# Altium PCB FEM.PcbDoc (part 2 of 2)
Units mil, origin at the board's own origin, x right, y up, seen from the top; angles counter-clockwise.
Board outline 1528 x 1869 mil, 4 copper layers (Top Layer, Internal Plane 1, Signal Layer 1, Bottom Layer), stack 60.752 mil thick; 238 components, 134 nets, 657 pads, 326 vias.
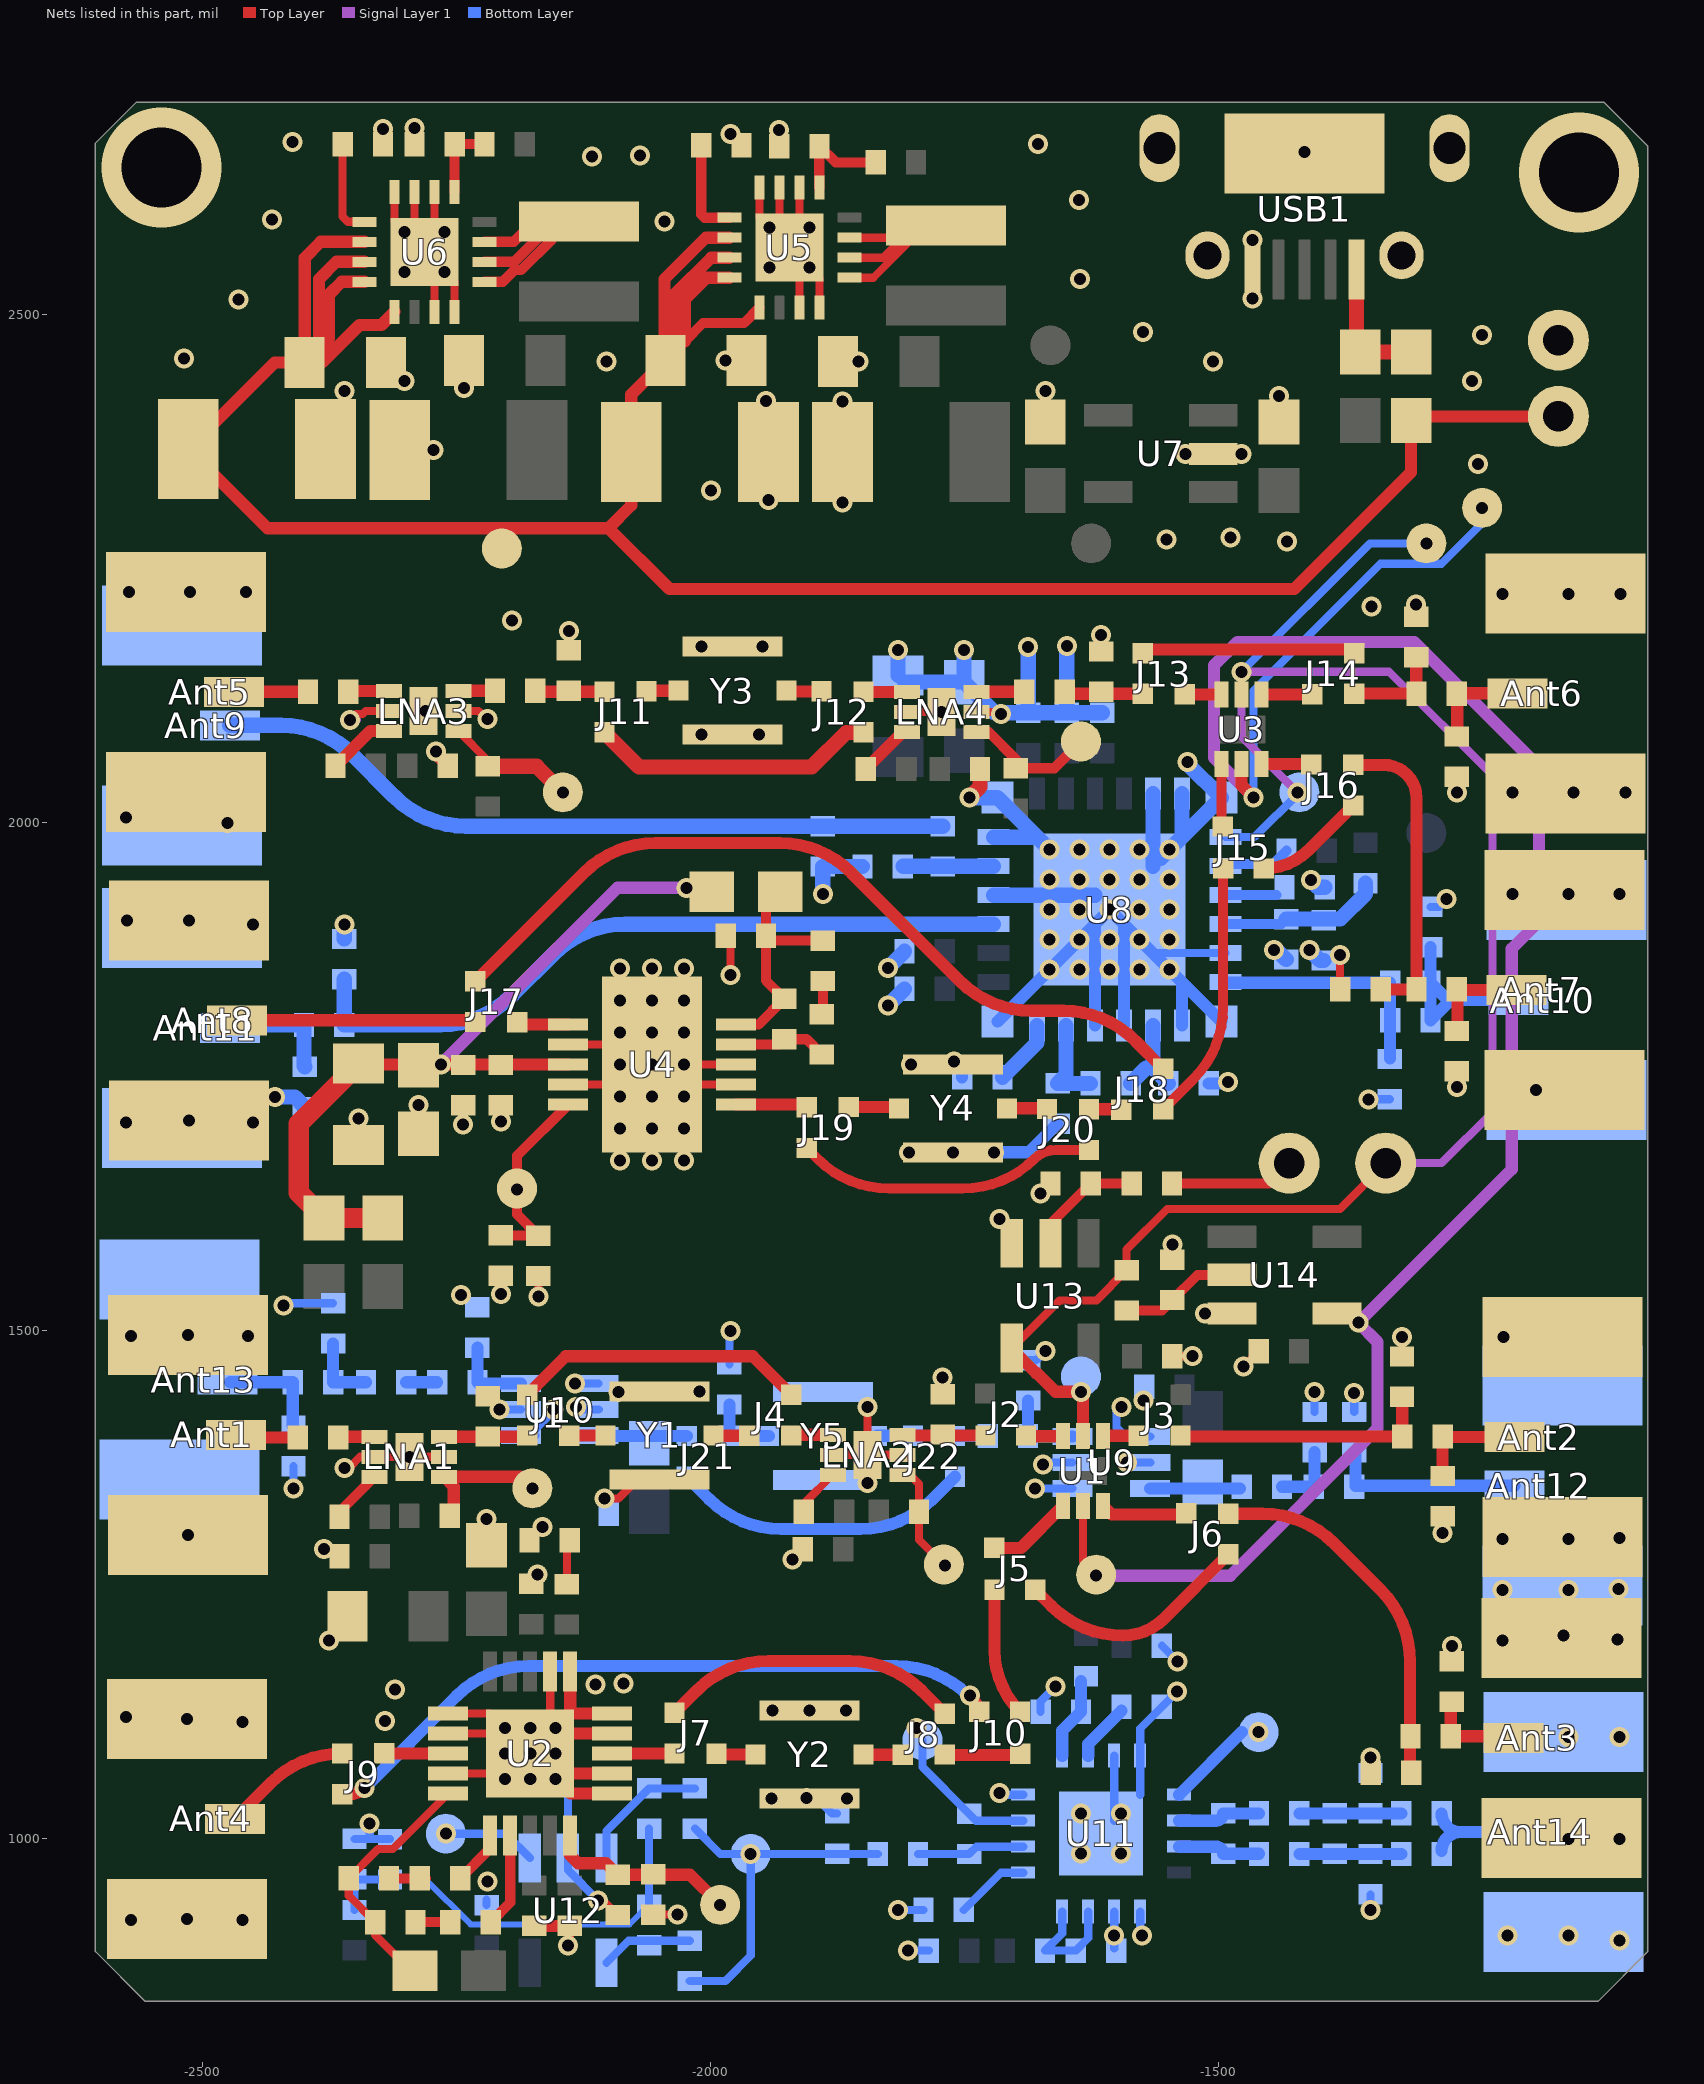
[diagram p4: the nets of this part, all layers, seen from the top]

## Via types
v1: diameter 19.68, hole 11.81, Top Layer to Bottom Layer, 315 vias
v2: diameter 20/20/20 (per signal layer), hole 12, Top Layer to Bottom Layer, 9 vias
v3: diameter 118.11, hole 78.74, Top Layer to Bottom Layer, 2 vias

## Nets (pads, with @x,y where several pads share a name; then routed paths per layer and width w, separated by ;. In a path a pad name is that pad's centre, name@x,y a point inside that pad or via, vN(x,y) a via of type N, cw(c..) or ccw(c..) an arc to the next point about the centre after c; other vN are vias at no path point) (continued)
GND: Ant1.GND Ant2.GND Ant3.GND Ant4.GND Ant5.GND Ant6.GND Ant7.GND Ant8.GND Ant9.GND Ant10.GND Ant11.GND Ant12.GND Ant13.GND Ant14.GND C1.1 C3.1 C4.1 C5.1 C6.1 C7.1 C8.1 C9.1 C11.1 C12.2 C13.2 C14.2 C15.1 C17.1 C19.1 C21.1 C22.1 C23.1 C24.1 C25.1 C26.1 C27.1 C28.1 C30.2 C31.2 C32.2 C33.2 C34.2 C35.2 C36.2 C37.1 C38.1 C39.2 C40.2 C41.1 C42.1 C43.2 C44.2 C45.1 C46.1 C47.1 C48.1 C49.2 C50.1 C51.1 C52.1 C53.1 C55.1 C56.1 C57.1 C59.1 C60.1 C61.1 C63.1 C64.1 C65.1 C66.1 C68.1 C69.1 C70.1 C71.1 C72.1 C73.1 C74.1 C75.1 C76.1 C82.1 C84.2 C85.2 C86.1 C87.1 C88.2 C89.1 C90.2 C91.2 C92.2 C93.2 LNA1.0 LNA1.2 LNA1.5 LNA2.0 LNA2.2 LNA2.5 LNA3.0 LNA3.2 LNA3.5 LNA4.0 LNA4.2 LNA4.5 R3.1 R4.1 R14.1 R17.2 R18.2 R21.2 R22.2 R23.2 R26.2 R27.2 R29.1 R37.1 T15.1 U2.0 U2.1 U2.2 U2.4 U2.11 U2.12 U2.14 U2.15 U2.16 U2.17 U4.0 U4.2 U4.4 U4.7 U4.8 U5.0 U5.6 U5.7 U5.8 U5.15 U5.16 U6.0 U6.6 U6.7 U6.8 U6.15 U6.16 U7.2 U8.0 U8.1 U8.6 U8.8 U8.9 U8.11 U8.12 U8.15 U8.19 U8.21 U8.22 U8.27 U8.28 U9.1 U9.2 U9.4 U9.5 U10.1 U10.2 U10.4 U10.5 U11.0 U11.1 U11.2 U11.8 U11.11 U11.12 U12.2 U13.3 U14.3 USB1.5 Y1.1 Y1.3 Y2.1 Y2.3 Y3.1 Y3.3 Y4.1 Y4.3 Y5.1 Y5.3 | length 6832
  Top Layer w8: v1(-2575,2005) -2549.85,2030.15 Ant5.GND@-2516,2030.15 -2505.15,2030.15 v1(-2475,2000) ; v1(-2574,1904) v1(-2513,1904) -2454,1904 v1(-2450,1900) ; v1(-2572,2227) Ant5.GND@-2516,2227 v1(-2512,2227) v1(-2457,2227) ; C39.2@-2378.48,2368 -2360,2386.48 v1(-2360,2425) ; v1(-2375,1195) -2357,1213 C11.1@-2357,1219 ; v1(-2360,1365) -2355.39,1365 -2344.39,1376 LNA1.5@-2330.25,1376 v1(-2296,1376) LNA1.2@-2261.75,1376 ; v1(-2354.42,2101.16) -2348.57,2107 -2341.86,2107 -2338.86,2110 LNA3.5@-2316.25,2110 ; C30.2@-2346,1683 v1(-2346,1709) ; C44.2@-2322,2668 v1(-2322,2683) ; C40.2@-2319,2453 v1(-2301,2435) ; U6.0@-2310.53,2591.53 U6.8@-2310.53,2621.06 ; C42.1@-2305.52,2367 v1(-2272,2367) ; R18.2@-2291,2668 v1(-2291,2684) ; U6.0@-2290.84,2571.84 U6.7@-2290.84,2621.06 ; C31.2@-2287,1694 v1(-2287,1722) ; LNA3.0@-2282,2110 v1(-2280,2110) ; U6.15@-2271.16,2502.94 U6.0@-2271.16,2552.16 ; U6.0@-2271.16,2571.84 U6.6@-2271.16,2621.06 ; v1(-2270,2070) -2275,2070 -2261,2056 C21.1@-2258.32,2056 ; U2.4@-2257.71,1064.32 U2.0@-2196.68,1064.32 ; U2.2@-2257.71,1103.68 U2.0@-2196.68,1103.68 ; U2.1@-2257.71,1123.37 U2.0@-2216.37,1123.37 ; U6.16@-2251.47,2502.94 U6.0@-2251.47,2532.47 ; LNA3.2@-2247.75,2110 -2227.83,2110 -2219.98,2102.16 v1(-2219.11,2102.16) ; v1(-2243,1703) C32.2@-2243,1722 ; v1(-2242,2428) C41.1@-2242,2455 ; C12.2@-2220,1289 v1(-2220,1315) ; v1(-2206,1536) R14.1@-2206,1554.32 ; v1(-2206,1706) C33.2@-2206,1722 ; R3.1@-2177.68,1294 v1(-2165,1306.68) ; C13.2@-2176,1251 -2165,1262 -2168,1262 v1(-2170,1260) ; v1(-2169,1534) C34.2@-2169,1554 ; U2.0@-2157.32,1103.68 U2.17@-2157.32,1164.71 ; v1(-2140,895) -2138,897 C15.1@-2138,914.32 ; U4.4@-2139.68,1742.32 U4.0@-2076.68,1742.32 ; U4.2@-2139.68,1781.68 U4.0@-2076.68,1781.68 ; C19.1@-2139,2169.69 v1(-2139,2189) ; v1(-2110.16,939.44) -2110.16,939.84 -2110,940 -2106,940 C14.2@-2091,925 ; v1(-2104,1335) -2090,1335 Y1.3@-2071.31,1353.69 ; v1(-2090,1440) -2089.69,1440.31 Y1.1@-2050,1440.31 v1(-2010.31,1440.31) ; v1(-2057,1762) v1(-2025.5,1762) U4.8@-1974.32,1762 ; R4.1@-2056,925.32 -2032.37,925.32 v1(-2032.16,925.53) ; U4.0@-2037.32,1742.32 U4.7@-1974.32,1742.32 ; v1(-2008.31,2086.69) Y3.3@-1978,2086.69 v1(-1951.69,2086.69) ; v1(-2008.31,2173.31) Y3.1@-1978,2173.31 v1(-1948.31,2173.31) ; v1(-1985,2455) C36.2@-1964,2455 ; C28.1@-1984.68,1889 -1980,1884.31 v1(-1980,1850) ; v1(-1980,2678) C43.2@-1969,2667 ; U5.0@-1951.53,2595.53 U5.8@-1951.53,2625.06 ; v1(-1945,2415) -1945,2367.52 C35.2@-1942.48,2365 v1(-1942.48,2317.52) ; v1(-1939.69,1039.69) Y2.1@-1902,1039.69 v1(-1865.31,1039.69) ; v1(-1938.69,1126.31) v1(-1902,1126.31) v1(-1866.31,1126.31) ; R17.2@-1932,2666 v1(-1932,2682) ; U5.0@-1931.84,2575.84 U5.7@-1931.84,2625.06 ; v1(-1918.68,1275) C7.1@-1908.68,1285 ; U5.15@-1912.16,2506.94 U5.0@-1912.16,2556.16 ; U5.0@-1912.16,2575.84 U5.6@-1912.16,2625.06 ; U5.16@-1892.47,2506.94 U5.0@-1892.47,2536.47 ; LNA2.5@-1879.25,1378 LNA2.0@-1845,1378 ; C37.1@-1874,2454 v1(-1854,2454) ; v1(-1869.52,2315.48) C38.1@-1869.52,2365 v1(-1869.52,2414.52) ; v1@-1845,1345 v1(-1845,1350) LNA2.0@-1845,1378 ; v1(-1845,1425) LNA2.0@-1845,1378 ; LNA2.2@-1810.75,1378 LNA2.0@-1845,1378 ; LNA4.5@-1806.25,2109 v1(-1772,2109) ; C3.1@-1771,1437.68 v1(-1771,1454) ; LNA4.2@-1737.75,2109 -1715.34,2109 v1(-1713.5,2107.16) ; v1(-1715,1610) -1703,1598 U13.3@-1703,1586.19 ; v1(-1675,1635) C92.2@-1665,1645 ; C45.1@-1670,2394.46 v1(-1670,2425) ; C22.1@-1615,2168.69 v1(-1615,2185) ; C90.2@-1545,1475 v1(-1525,1475) ; C93.2@-1545,1570 v1(-1545,1585) ; v1(-1532,2363) U7.2@-1504.81,2363 v1(-1477,2363) ; v1(-1513,1517) U14.3@-1486.19,1517 ; v1(-1475,1465) C91.2@-1460,1480 ; v1(-1466.18,2516.18) USB1.5@-1466.18,2544.69 v1(-1466.18,2573.82) ; C46.1@-1440,2394.46 v1(-1440,2420) ; USB1.5@-1415,2658.86 v1(-1415,2660) ; v1(-1380,1870) -1380,1836.32 C26.1@-1379.69,1836 ; C4.1@-1319,1474.68 v1(-1319,1494) ; C23.1@-1305,2202.69 v1(-1305,2215) ; v1(-1279,1301) C5.1@-1279,1317.32 ; v1(-1265,1740) C27.1@-1265,1755.32 ; v1(-1265,2030) C24.1@-1265,2045.31 ; v1(-1218.85,1493.85) Ant2.GND@-1161,1493.85 ; v1(-1187,1737) Ant7.GND@-1159,1737
  Top Layer w12: C17.1@-2173,914.32 C15.1@-2138,914.32 ; U2.0@-2157.32,1064.32 U2.12@-2096.29,1064.32 ; U2.0@-2157.32,1103.68 U2.14@-2096.29,1103.68 ; U2.0@-2137.63,1044.63 U2.11@-2096.29,1044.63 ; U2.16@-2137.63,1164.71 -2137.63,1123.37 U2.15@-2096.29,1123.37 ; v1(-1804.31,1675.69) v1(-1761,1675.69) v1(-1720.69,1675.69) ; v1(-1802.31,1762.31) Y4.3@-1761,1762.31
  Top Layer w15: v1(-1744.76,2024.76) -1734.32,2035.21 C25.1@-1734.32,2053
  Signal Layer 1 w8: v1(-2354.42,2101.16) v1@-2347.7,2101.16 ; v1(-2219.11,2102.16) v1@-2219.11,2104.11 ; v1@-2034.47,925.53 v1(-2032.16,925.53) ; v1@-1715,2108.66 v1(-1713.5,2107.16)
  Bottom Layer w8: v1(-2420,1525) -2415,1525 -2412.9,1527.1 C72.1@-2371,1527.1 ; v1(-2410,1345) C70.1@-2410,1366.73 ; C88.2@-2349.68,999.68 -2335,999.68 ; v1(-2335,1015) -2335,999.68 ; R37.1@-2315,999.68 -2335,999.68 ; C89.1@-2220,934.68 C89.1@-2220,940 ; v1(-2207.42,1422.42) U10.2@-2186.19,1422.42 ; U10.1@-2186.19,1396.83 U10.1@-2178.17,1396.83 ; U10.1@-2171.83,1396.83 U10.1@-2178.17,1396.83 ; v1(-2154.16,1422.49) -2154.16,1420.84 U10.1@-2178.17,1396.83 ; v2(-2152,1059) -2140,1047 U12.2@-2140,981.19 -2140,969.28 v1(-2110.16,939.44) ; v1(-2133.01,1448.01) U10.4@-2109.81,1448.01 ; v1(-2132,1425) -2134.83,1425 -2137.42,1422.42 U10.5@-2109.61,1422.42 ; C68.1@-1981,1467.1 -1981,1499 v1(-1980,1500) ; v1(-1905,1040) -1895,1040 -1880,1025 C85.2@-1875,1025 ; v1(-1815,930) C84.2@-1790,930 ; v1(-1805,890) C87.1@-1784.68,890 ; v1(-1715,1045) -1713.39,1043.39 U11.8@-1691.77,1043.39 ; C69.1@-1687,1471.1 -1678.9,1471.1 v1(-1670,1480) ; v1(-1680,1345) -1679.83,1344.83 U9.1@-1643.19,1344.83 ; C75.1@-1674.68,1125 -1674.68,1135.32 v1(-1660,1150) ; v1(-1672.46,1368.57) -1670.62,1370.42 U9.2@-1643.19,1370.42 ; C86.1@-1602.2,891.89 v1(-1602.2,905) ; v1@-1602.2,910 v1(-1602.2,905) ; U11.2@-1602.2,928.23 v1(-1602.2,905) ; U11.0@-1602.2,1017.8 U11.11@-1602.2,1081.77 ; v1(-1595,1425) -1600,1420 -1600,1405 -1591.01,1396.01 U9.4@-1566.81,1396.01 ; v1(-1589.58,1370.42) U9.5@-1566.61,1370.42 ; U11.1@-1576.61,928.23 -1576.61,906.61 v1(-1575,905) ; U11.0@-1576.61,1043.39 U11.12@-1576.61,1081.77 -1576.61,1108.7 R29.1@-1555.32,1130 v1(-1540.32,1145) ; U8.0@-1564.13,1871.71 U8.6@-1492.77,1871.71 ; C74.1@-1555.32,1190 v1(-1540,1174.68) ; C65.1@-1405,1420.1 v1(-1405,1440) ; C66.1@-1366,1420.1 v1(-1366,1439) ; v1(-1352.1,1727.9) C64.1@-1331,1727.9 ; v1(-1350,930) C82.1@-1350,945.32 ; C76.1@-1350,1064.68 v1(-1350,1080) ; C73.1@-1291,1917.27 -1282.73,1917.27 v1(-1275,1925)
  Bottom Layer w12: v1(-1760,1765) -1751.94,1756.94 R23.2@-1751.94,1749.53 ; v1(-1720.69,1675.69) -1686.09,1675.69 C55.1@-1657.94,1703.84 ; U8.15@-1717.18,1804.29 U8.0@-1621.22,1900.26 ; U8.12@-1621.22,1800.35 U8.0@-1621.22,1900.26 ; U8.11@-1592.67,1800.35 U8.0@-1592.67,1900.26 ; U8.9@-1535.59,1800.35 U8.0@-1535.59,1843.17 ; C59.1@-1509.26,1743.53 -1491.47,1743.53 v1(-1490,1745) ; U8.8@-1496.71,1804.29 U8.0@-1535.59,1843.17 ; U8.0@-1621.22,1900.26 v1(-1606.94,1914.53) U8.0@-1592.67,1900.26 ; U8.0@-1592.67,1900.26 -1564.13,1871.71 U8.0@-1535.59,1843.17
  Bottom Layer w15: v1(-2428,1730) -2408.68,1730 C56.1@-2399,1720.32 ; C57.1@-2360,1885.69 v1(-2360,1900) ; v1(-1889,1930) R26.2@-1889,1957 R27.2@-1850,1957 ; v1(-1825,1820) -1808.63,1836.37 C48.1@-1808.63,1836.53 ; v1(-1825,1857.16) C47.1@-1808.63,1873.53 ; C53.1@-1815,2145 v1(-1815,2170) ; C53.1@-1808.46,2138.46 C52.1@-1750,2138.46 ; v1(-1750,2170) C52.1@-1750,2138.46 ; v1(-1744.76,2024.76) U8.22@-1717.18,2024.76 v1(-1666,1973.58) ; U8.19@-1721.12,1928.8 U8.0@-1621.22,1928.8 ; U8.21@-1721.12,1985.89 U8.0@-1678.3,1985.89 ; v1(-1686.94,2173.06) C50.1@-1686.94,2108.21 ; v1(-1648.94,2173.94) C63.1@-1648.94,2108.21 ; C51.1@-1613.94,2108.21 C63.1@-1648.94,2108.21 ; U8.0@-1564.13,1957.34 U8.27@-1564.13,2028.7 ; U8.0@-1556.47,1965 U8.0@-1535.59,1985.89 ; v1(-1547.89,1973.58) U8.0@-1535.59,1985.89 ; U8.28@-1535.59,2028.7 U8.0@-1535.59,1985.89 ; v1(-1530,2060) -1530,2058.06 U8.1@-1496.71,2024.76 U8.0@-1535.59,1985.89 ; v1(-1445,1875) -1442.42,1875 C49.2@-1432.94,1865.53 ; v1(-1410,1875) -1399.53,1864.53 R22.2@-1395.94,1864.53 ; v1@-1410,1945 v1@-1408.86,1943.86 ; v1(-1408.79,1943.86) v1@-1408.86,1943.86 ; R21.2@-1394.94,1936.53 -1401.53,1936.53 v1@-1408.86,1943.86 ; C52.1@-1750,2138.46 -1719.75,2108.21 C50.1@-1686.94,2108.21 ; C50.1@-1686.94,2108.21 C63.1@-1648.94,2108.21
  other v1: -1105,900 -1215,905 -1155,905 -2570,920 -2460,920 -2515,921.15 -2219,958 -1634.68,985.32 -1595.32,985.32 -1155,1000 -1105,1000 -1634.68,1024.68 -1595.32,1024.68 -1155,1100 -1105,1100 -2460,1115 -2320,1116 -2515,1118 -2575,1120 -2310,1147 -2113,1152 -2085,1153 -1270,1190 -1220,1195 -1107,1196 -1160,1200 -1220,1245 -1155,1245 -1106,1246 -2380,1285 -1220,1295 -1155,1295 -1105,1296 -2514,1299.15 -1573.58,1431.42 -2570,1495 -2455,1495 -2514,1496 -2245,1535 -2088.5,1667.51 -2057,1667.51 -2025.5,1667.51 -2088.5,1699.01 -2057,1699.01 -2025.5,1699.01 -2575,1705 -2450,1705 -2513,1707.15 -2088.5,1730.5 -2057,1730.5 -2025.5,1730.5 -2088.5,1762 -2088.5,1793.5 -2057,1793.5 -2025.5,1793.5 -2088.5,1824.99 -2057,1824.99 -2025.5,1824.99 -1666,1855.47 -1636.47,1855.47 -1606.94,1855.47 -1577.42,1855.47 -1547.89,1855.47 -2088.5,1856.49 -2057,1856.49 -2025.5,1856.49 -1666,1885 -1636.47,1885 -1606.94,1885 -1577.42,1885 -1547.89,1885 -1666,1914.53 -1636.47,1914.53 -1577.42,1914.53 -1547.89,1914.53 -1210,1930 -1155,1930 -1105,1930 -1666,1944.06 -1636.47,1944.06 -1606.94,1944.06 -1577.42,1944.06 -1547.89,1944.06 -1636.47,1973.58 -1606.94,1973.58 -1577.42,1973.58 -1210,2030 -1150,2030 -1099,2030 -2195,2199 -1349,2213 -1220,2225 -1155,2225 -1104,2225 -1432,2277 -1551,2279 -1488,2281 -1999,2327 -1244,2353 -1250,2435 -2102,2454 -1505,2454 -2518,2457 -1240,2480 -1574,2483 -2464,2515 -1636,2535 -2300.68,2542.31 -2261.32,2542.31 -1941.68,2546.31 -1902.32,2546.31 -2300.68,2581.69 -2261.32,2581.69 -1941.68,2585.69 -1902.32,2585.69 -2045,2592 -2431,2594 -1637,2613 -2116,2656 -2069,2657 -1677,2668 -2411,2670
  other v2: -2202,1059 -2177,1059 -2202,1084 -2177,1084 -2152,1084 -2202,1109 -2177,1109 -2152,1109
  other v3: -1145,2640 -2540,2645
NetAnt1_1: Ant1.1 C2.1 | length 58.5
  Top Layer w12: Ant1.1@-2464.18,1395 C2.1@-2405.68,1395
NetAnt2_1: Ant2.1 C5.2 L2.2 | length 108.8
  Top Layer w12: C5.2@-1279,1357 -1279,1394.85 -1278.43,1395.43 Ant2.1@-1208.24,1395.43
NetAnt3_1: Ant3.1 C9.2 L4.2 | length 96.4
  Top Layer w12: C9.2@-1270,1135 ccw(c-1267.59,1132.59) -1271,1132.59 L4.2@-1271,1101 -1213.05,1101 cw(c-1213.05,1095.62) Ant3.1@-1209.24,1099.43
NetAnt4_1: Ant4.1 J9.2 | length 128.1
  Top Layer w12: Ant4.1@-2467.76,1019.57 -2432.56,1054.77 cw(c-2362,984.22) J9.2@-2362,1084
NetAnt5_1: Ant5.1 C20.1 | length 72.6
  Top Layer w12: Ant5.1@-2468.33,2129 C20.1@-2395.68,2129
NetAnt6_1: Ant6.1 C24.2 L9.2 | length 101.3
  Top Layer w12: C24.2@-1264.57,2085.43 -1264.57,2127.43 Ant6.1@-1205.24,2127.43
NetAnt7_1: Ant7.1 C27.2 L11.2 | length 98
  Top Layer w12: C27.2@-1264.43,1795.57 -1264.43,1835.43 Ant7.1@-1206.24,1835.43
NetAnt8_1: Ant8.1 J17.2 | length 235.7
  Top Layer w12: Ant8.1@-2465.76,1805.57 -2232.57,1805.57 cw(c-2232.57,1804) J17.2@-2231,1804
NetAnt9_1: Ant9.1 R25.1 R26.1 | length 734.3
  Bottom Layer w15: Ant9.1@-2472.76,2096.01 -2422.43,2096.01 cw(c-2422.43,1996.01) -2351.72,2066.72 -2310.97,2025.97 ccw(c-2240.26,2096.69) -2240.26,1996.69 R26.1@-1889,1996.69 R25.1@-1771,1996.69
NetAnt10_1: Ant10.1 C54.2 C73.2 L21.2 | length 192.8
  Bottom Layer w12: C73.2@-1291,1877.58 C54.2@-1291,1842.58 ; Ant10.1@-1204.24,1825.57 -1273.99,1825.57 ; C54.2@-1291,1842.58 -1273.99,1825.57 ; C54.2@-1291,1842.58 L21.2@-1291,1805.58 -1273.99,1822.59 -1273.99,1825.57
NetAnt11_1: Ant11.1 C56.2 L14.1 | length 115.1
  Bottom Layer w15: Ant11.1@-2472.76,1798.01 cw(c-2465.53,1790.78) -2465.53,1801 L14.1@-2399.68,1801 -2399.68,1761.65 ccw(c-2397.35,1761.65) C56.2@-2399,1760
NetAnt12_1: Ant12.1 C66.2 L17.2 | length 188.3
  Bottom Layer w12: C66.2@-1364.84,1379.26 -1364.84,1347.57 Ant12.1@-1208.24,1347.57
NetAnt13_1: Ant13.1 C70.2 L19.1 | length 104
  Bottom Layer w12: Ant13.1@-2472.33,1449.42 L19.1@-2410.68,1449.42 C70.2@-2410.68,1407.1
NetAnt14_1: Ant14.1 C77.2 C83.2 | length 112.2
  Bottom Layer w12: C83.2@-1280,988.15 cw(c-1261.57,988.15) -1261.57,1006.57 ; C77.2@-1280,1025 ccw(c-1261.57,1025) -1261.57,1006.57 ; Ant14.1@-1207.24,1006.57 -1261.57,1006.57
NetC1_2: C1.2 J1.2 LNA1.3 | length 80.4
  Top Layer w12: LNA1.3@-2261.75,1395.68 J1.2@-2181.32,1395.68
NetC2_2: C2.2 LNA1.4 | length 35.1
  Top Layer w12: C2.2@-2365.32,1395.68 LNA1.4@-2330.25,1395.68
NetC3_2: C3.2 J2.2 LNA2.3 | length 81.1
  Top Layer w12: LNA2.3@-1810.06,1397 J2.2@-1729,1397
NetC4_2: C4.2 J3.2 L2.1 | length 256.4
  Top Layer w12: J3.2@-1536,1396 L2.1@-1318.69,1396 -1318.69,1434.68 C4.2@-1319,1435
NetC8_2: C8.2 J6.2 L4.1 | length 363.5
  Top Layer w12: J6.2@-1490,1320 -1456.42,1320 cw(c-1456.42,1220) -1385.71,1290.71 -1340.29,1245.29 cw(c-1411,1174.58) -1311,1174.58 C8.2@-1311,1066
NetC10_1: C10.1 R3.2 | length 40.3
  Top Layer w8: C10.1@-2141,1250.68 R3.2@-2141,1291
NetC14_1: C14.1 R4.2 T5.1 U2.10 | length 187.4
  Top Layer w12: U2.10@-2137.63,1003.29 -2137.63,983.63 -2130,976 -2102.32,976 C14.1@-2091,964.68 -2019.68,964.68 v1(-1990,935)
NetC16_1: C16.1 L5.2 | length 34.3
  Top Layer w10: L5.2@-2290,918 C16.1@-2255.68,918
NetC16_2: C16.2 U2.7 | length 93.3
  Top Layer w10: C16.2@-2216,918 -2196.68,937.32 U2.7@-2196.68,1003.29
NetC18_2: C18.2 R5.1 | length 36.3
  Top Layer w10: C18.2@-2316,961 R5.1@-2279.68,961
NetC19_2: C19.2 J11.2 L6.2 | length 67
  Top Layer w12: L6.2@-2171,2129 J11.2@-2104,2129
NetC20_2: C20.2 LNA3.4 | length 39.1
  Top Layer w12: C20.2@-2355.32,2129.69 LNA3.4@-2316.25,2129.69
NetC22_2: C22.2 J13.2 L8.2 | length 75
  Top Layer w12: L8.2@-1649,2127 J13.2@-1574,2127
NetC23_2: C23.2 J14.2 L9.1 | length 96.4
  Top Layer w12: J14.2@-1365.69,2127.31 -1305,2127.31 C23.2@-1305,2163
NetC26_2: C26.2 J16.2 L11.1 | length 304.8
  Top Layer w12: J16.2@-1367,2057 -1337,2057 cw(c-1337,2024.69) -1304.69,2024.69 L11.1@-1304.69,1836 C26.2@-1340,1836
NetC28_2: C28.2 C29.2 R9.2 R10.1 U4.10 | length 227.4
  Top Layer w10: U4.10@-1974.32,1801.37 -1952.31,1801.37 R10.1@-1927,1826.68 -1945,1844.68 C28.2@-1945,1889 -1945,1918 R9.2@-1931,1932 ; C28.2@-1940,1884 C29.2@-1889,1884
NetC29_1: C29.1 R13.1 | length 31.6
  Top Layer w10: R13.1@-1889,1812.68 C29.1@-1889,1844.32
NetC34_1: C34.1 R14.2 T10.1 U4.5 | length 195.2
  Top Layer w10: R14.2@-2205.68,1593.68 C34.1@-2169,1593.68 -2190,1614.68 T10.1@-2190,1640 -2190,1672.31 U4.5@-2139.68,1722.63
  other v1: -2190,1639
NetC43_1: C43.1 U5.9 | length 97.3
  Top Layer w10: C43.1@-2008.68,2667 -2008.68,2598.69 -2005.53,2595.53 U5.9@-1981.06,2595.53
NetC44_1: C44.1 U6.9 | length 95.1
  Top Layer w8: C44.1@-2361.68,2668 -2361.68,2596.69 -2356.53,2591.53 U6.9@-2340.06,2591.53
NetC49_1: C49.1 R20.2 R22.1 U8.5 | length 153.6
  Bottom Layer w10: U8.5@-1492.77,1900.26 C49.1@-1437.9,1900.26
  Bottom Layer w15: C49.1@-1432.94,1905.21 -1379.79,1905.21 -1354.94,1930.06 R20.2@-1354.94,1940.53
NetC54_1: C54.1 C64.2 L21.1 U8.7 | length 236.2
  Bottom Layer w12: U8.7@-1492.18,1842.58 -1412.97,1842.58 -1412.92,1842.53 C54.1@-1330.69,1842.53 ; C64.2@-1330.69,1767.9 L21.1@-1330.69,1805.58 C54.1@-1330.69,1842.53 ; C54.1@-1330.69,1842.58 C54.1@-1330.69,1842.53
NetC55_2: C55.2 C58.1 U8.13 | length 92.5
  Bottom Layer w15: U8.13@-1649.76,1800.35 -1649.76,1751.71 C55.2@-1657.94,1743.53 C58.1@-1625.63,1743.53
NetC57_2: C57.2 L14.2 U8.18 | length 716.4
  Bottom Layer w15: C57.2@-2360,1846 L14.2@-2360,1801 -2265.42,1801 ccw(c-2265.42,1901) -2194.71,1830.29 -2154.03,1870.97 cw(c-2083.32,1800.26) -2083.32,1900.26 U8.18@-1721.12,1900.26
NetC58_2: C58.2 C59.2 U8.10 | length 91.2
  Bottom Layer w15: C58.2@-1585.94,1743.53 -1570.76,1758.71 -1564.13,1758.71 ; U8.10@-1564.13,1800.35 -1564.13,1758.71 ; C59.2@-1548.94,1743.53 -1564.13,1758.71
NetC62_1: C62.1 L15.2 U9.6 | length 88.5
  Bottom Layer w12: U9.6@-1566.81,1344.83 C62.1@-1478.28,1344.83
NetC62_2: C62.2 C65.2 L17.1 | length 65.6
  Bottom Layer w12: C62.2@-1437,1346.42 L17.1@-1405.69,1346.42 -1405,1347.1 C65.2@-1405,1380.42
NetC67_1: C67.1 C72.2 L19.2 | length 70.3
  Bottom Layer w12: C72.2@-2371,1487.42 L19.2@-2371,1449.42 C67.1@-2338.68,1449.42
NetC67_2: C67.2 L20.1 | length 30.3
  Bottom Layer w12: C67.2@-2299,1449.42 L20.1@-2268.68,1449.42
NetC68_2: C68.2 J21.3 Y5.4 | length 70.1
  Bottom Layer w12: J21.3@-1981.66,1396.77 -1981,1397.43 C68.2@-1981,1427.42 ; J21.3@-1981.31,1396.42 Y5.4@-1942.15,1396.42
NetC69_2: C69.2 L18.2 U9.3 | length 79
  Bottom Layer w12: C69.2@-1687,1431.42 L18.2@-1687,1396.42 -1686.59,1396.01 U9.3@-1643.19,1396.01
NetC71_2: C71.2 L20.2 U10.3 | length 77.4
  Bottom Layer w12: C71.2@-2229,1483.42 L20.2@-2229,1449.42 -2227.59,1448.01 U10.3@-2186.19,1448.01
NetC75_2: C75.2 R30.2 U11.9 | length 80.8
  Bottom Layer w12: U11.9@-1653.39,1081.77 -1653.39,1106.61 C75.2@-1635,1125 R30.2@-1635,1155
NetC76_2: C76.2 C77.1 C78.2 C79.2 | length 100.3
  Bottom Layer w12: C78.2@-1420,1025 C79.2@-1385,1025 C76.2@-1350,1025 C77.1@-1319.69,1025
NetC78_1: C78.1 C80.2 U11.14 | length 82.7
  Bottom Layer w12: U11.14@-1538.23,1017.8 -1502.2,1017.8 ccw(c-1502.2,1025) C80.2@-1495,1025 C78.1@-1459.69,1025
NetC79_1: C79.1 C81.2 C82.2 C83.1 | length 100.3
  Bottom Layer w12: C81.2@-1420,985 C82.2@-1350,985 C83.1@-1319.69,985
NetC80_1: C80.1 C81.1 U11.15 | length 82.5
  Bottom Layer w12: U11.15@-1538.23,992.2 -1501.89,992.2 cw(c-1501.89,985.32) C80.1@-1495,985.32 C81.1@-1459.69,985.32
NetC84_1: C84.1 U11.5 | length 73.7
  Bottom Layer w8: C84.1@-1750.32,930 -1713.7,966.61 U11.5@-1691.77,966.61
NetC86_2: C86.2 R33.1 U11.3 U11.4 | length 118.8
  Bottom Layer w8: U11.4@-1653.39,928.23 -1653.39,906.93 R33.1@-1670.32,890 C86.2@-1640,890 -1627.8,902.2 U11.3@-1627.8,928.23
NetC88_1: C88.1 R35.2 R36.2 R37.2 R38.2 | length 456.3
  Bottom Layer w6: C88.1@-2350,960.32 -2280.36,960.32 -2235.73,915.68 -2079.32,915.68 R38.2@-2060,935
  Bottom Layer w8: R35.2@-2350,930 -2350,959.68 -2349.68,960 R37.2@-2315,960 ; R38.2@-2060,935 R36.2@-2060,1010
NetC92_1: C92.1 R40.2 U13.2 | length 96.4
  Top Layer w10: U13.2@-1665,1605.32 C92.1@-1625.32,1645 R40.2@-1585,1645
NetC93_1: C93.1 R41.2 U14.2 | length 118.3
  Top Layer w10: R41.2@-1590,1520 -1555.32,1520 C93.1@-1545,1530.32 -1520.32,1555 U14.2@-1486.19,1555
NetJ1_1: J1.1 J4.1 | length 291.5
  Top Layer w12: J1.1@-2180,1437 -2142,1475 -1958,1475 J4.1@-1920,1437
NetJ1_3: J1.3 Y1.2 | length 35.2
  Top Layer w12: J1.3@-2138.31,1397 Y1.2@-2103.15,1397
NetJ2_1: J2.1 U1.3 | length 35.6
  Top Layer w12: J2.1@-1688.25,1396.25 U1.3@-1652.68,1396.25
NetJ3_3: J3.3 U1.1 | length 34.6
  Top Layer w12: U1.1@-1612.92,1396.65 J3.3@-1578.34,1396.65
NetJ4_2: J4.2 LNA2.4 | length 40.1
  Top Layer w12: J4.2@-1919.32,1397.68 LNA2.4@-1879.25,1397.68
NetJ4_3: J4.3 Y1.4 | length 35.2
  Top Layer w12: Y1.4@-1996.5,1396.65 J4.3@-1961.34,1396.65
NetJ5_1: J5.1 J6.1 | length 235
  Top Layer w12: J5.1@-1680,1245 -1664.29,1229.29 ccw(c-1593.58,1300) -1593.58,1200 ccw(c-1593.58,1256.92) -1553.33,1216.67 J6.1@-1490,1280
NetJ5_2: J5.2 J10.2 | length 126.7
  Top Layer w12: J5.2@-1720,1245 -1720,1185.36 ccw(c-1634.64,1185.36) J10.2@-1695,1125
NetJ5_3: J5.3 U1.4 | length 84.8
  Top Layer w12: J5.3@-1720.35,1286.34 -1694.09,1286.34 U1.4@-1652.68,1327.75
NetJ6_3: J6.3 U1.6 | length 78.2
  Top Layer w12: U1.6@-1613.32,1327.75 -1604.91,1319.34 J6.3@-1538.65,1319.34
NetJ7_1: J7.1 J8.1 | length 300.1
  Top Layer w12: J7.1@-2035,1124 -2013.29,1145.71 cw(c-1942.58,1075) -1942.58,1175 -1862.42,1175 cw(c-1862.42,1075) -1791.71,1145.71 J8.1@-1769,1123
NetJ7_2: J7.2 U2.13 | length 61.3
  Top Layer w12: U2.13@-2096.29,1084 J7.2@-2035,1084
NetJ7_3: J7.3 Y2.4 | length 38.7
  Top Layer w12: J7.3@-1993.66,1083.65 ccw(c-1992.1,1085.2) -1992.1,1083 Y2.4@-1955.15,1083
NetJ8_2: J8.2 J10.3 | length 74.9
  Top Layer w12: J8.2@-1769,1083 ccw(c-1767.44,1084.56) -1767.44,1082.35 -1697.8,1082.35 ccw(c-1697.8,1086.82) J10.3@-1694.65,1083.66
NetJ8_3: J8.3 Y2.2 | length 38.2
  Top Layer w12: Y2.2@-1848.5,1082.65 J8.3@-1810.34,1082.65
NetJ9_1: J9.1 J10.1 | length 692.2
  Top Layer w12: J9.1@-2362,1044 -2354.49,1044 ccw(c-2354.49,1064.49) v1(-2340,1050) ; v1(-1744,1141) -1744,1139 -1738.54,1133.54 cw(c-1747.07,1125) J10.1@-1735,1125
  Bottom Layer w12: v1(-2340,1050) -2249.29,1140.71 cw(c-2178.58,1070) -2178.58,1170 -1816.42,1170 cw(c-1816.42,1070) -1745.71,1140.71 -1745.42,1141 v1(-1744,1141)
NetJ9_3: J9.3 U2.3 | length 62.6
  Top Layer w12: J9.3@-2320.31,1084 U2.3@-2257.71,1084
NetJ11_1: J11.1 J12.1 | length 283.2
  Top Layer w15: J11.1@-2104,2089 -2070,2055 -1900,2055 -1866,2089 J12.1@-1849,2089
NetJ11_3: J11.3 Y3.2 | length 30.9
  Top Layer w12: J11.3@-2062.02,2130 Y3.2@-2031.15,2130
NetJ12_2: J12.2 LNA4.4 | length 42.4
  Top Layer w12: J12.2@-1848.68,2128.69 LNA4.4@-1806.25,2128.69
NetJ12_3: J12.3 Y3.4 | length 33.9
  Top Layer w12: Y3.4@-1924.2,2129.35 J12.3@-1890.34,2129.35
NetJ13_1: J13.1 J14.1 | length 208
  Top Layer w12: J13.1@-1570.5,2170.5 -1366,2170.5 J14.1@-1366,2167
NetJ13_3: J13.3 U3.3 | length 35.6
  Top Layer w12: J13.3@-1532.27,2126.25 U3.3@-1496.69,2126.25
NetJ14_3: J14.3 U3.1 | length 49.6
  Top Layer w12: U3.1@-1457.31,2126.25 J14.3@-1407.73,2126.25
NetJ15_1: J15.1 J16.1 | length 111
  Top Layer w12: J15.1@-1455,1955 ccw(c-1455,2017.77) -1410.62,1973.38 J16.1@-1367,2017
NetJ15_2: J15.2 J18.2 | length 257.1
  Top Layer w10: J18.2@-1554,1718 -1524.29,1747.71 ccw(c-1595,1818.42) -1495,1818.42 J15.2@-1495,1955
NetJ15_3: J15.3 U3.4 | length 60.1
  Top Layer w10: J15.3@-1496.69,1997.67 U3.4@-1496.69,2057.75
NetJ16_3: J16.3 U3.6 | length 48.6
  Top Layer w12: U3.6@-1457.31,2057.75 J16.3@-1408.73,2057.75
NetJ17_1: J17.1 J18.1 | length 808.1
  Top Layer w12: J17.1@-2231,1844 -2124.29,1950.71 cw(c-2053.58,1880) -2053.58,1980 -1931.42,1980 cw(c-1931.42,1880) -1860.71,1950.71 -1754.29,1844.29 ccw(c-1683.58,1915) -1683.58,1815 -1652.42,1815 cw(c-1652.42,1715) -1581.71,1785.71 J18.1@-1554,1758
NetJ17_3: J17.3 U4.1 | length 51.3
  Top Layer w12: J17.3@-2189.66,1803.65 ccw(c-2187.39,1803.65) -2187.39,1801.37 U4.1@-2139.68,1801.37
NetJ18_3: J18.3 J20.2 | length 31.3
  Top Layer w12: J20.2@-1627,1718 J18.3@-1595.69,1718
NetJ19_1: J19.1 J20.1 | length 300.4
  Top Layer w10: J19.1@-1905,1680 -1894.29,1669.29 ccw(c-1823.58,1740) -1823.58,1640 -1751.42,1640 ccw(c-1751.42,1740) -1680.71,1669.29 cw(c-1659.68,1648.26) -1659.68,1678 J20.1@-1627,1678
NetJ19_2: J19.2 U4.6 | length 66.7
  Top Layer w12: U4.6@-1974.32,1722.63 J19.2@-1907.63,1722.63
NetJ19_3: J19.3 Y4.4 | length 48.2
  Top Layer w12: J19.3@-1863.66,1720.35 Y4.4@-1815.5,1720.35
NetJ20_3: J20.3 Y4.2 | length 38.9
  Top Layer w12: Y4.2@-1707.85,1719 J20.3@-1668.98,1719
NetJ21_1: J21.1 J22.1 | length 298
  Bottom Layer w12: J21.1@-2023,1356.42 -2000.87,1334.29 ccw(c-1930.16,1405) -1930.16,1305 -1851.84,1305 ccw(c-1851.84,1405) -1781.13,1334.29 J22.1@-1759,1356.42
NetJ21_2: J21.2 L16.2 U10.6 | length 86.9
  Bottom Layer w12: U10.6@-2109.81,1396.83 ccw(c-2108.82,1397.82) -2108.82,1396.42 -2062,1396.42 J21.2@-2023,1396.42
NetJ22_2: J22.2 L18.1 | length 32.3
  Bottom Layer w12: J22.2@-1759,1396.42 L18.1@-1726.68,1396.42
NetJ22_3: J22.3 Y5.2 | length 35.2
  Bottom Layer w12: Y5.2@-1835.5,1396.77 J22.3@-1800.34,1396.77
NetL1_1: L1.1 LNA1.6 | length 48.7
  Top Layer w10: L1.1@-2364.68,1321.88 LNA1.6@-2330.25,1356.32
NetL3_1: L3.1 LNA2.6 | length 40.2
  Top Layer w8: L3.1@-1907.68,1329.88 LNA2.6@-1879.25,1358.32
NetL6_1: L6.1 LNA3.3 | length 35.7
  Top Layer w12: LNA3.3@-2247.43,2130 L6.1@-2211.68,2130
NetL7_1: L7.1 LNA3.6 | length 66.6
  Top Layer w12: L7.1@-2368.68,2056 -2334.37,2090.31 LNA3.6@-2316.25,2090.31
NetL8_1: L8.1 LNA4.3 | length 46.7
  Top Layer w12: LNA4.3@-1737.43,2129 L8.1@-1690.68,2129
NetL10_1: L10.1 LNA4.6 | length 55.5
  Top Layer w12: L10.1@-1846.68,2053 -1810.37,2089.31 LNA4.6@-1806.25,2089.31
NetL12_1: L12.1 U5.1 U5.2 U5.3 | length 223.1
  Top Layer w8: U5.1@-1862.94,2536.47 -1839.37,2536.47 L12.1@-1800,2575.84 ; U5.2@-1862.94,2556.16 -1829.68,2556.16 L12.1@-1810,2575.84 ; U5.3@-1862.94,2575.84 L12.1@-1810,2575.84 ; L12.1@-1780.16,2575.84 L12.1@-1800,2575.84 ; L12.1@-1810,2575.84 L12.1@-1800,2575.84
NetL13_1: L13.1 U6.1 U6.2 U6.3 | length 227.3
  Top Layer w10: U6.1@-2221.94,2532.47 -2204.08,2532.47 -2192.61,2543.94 -2186.06,2543.94 L13.1@-2155,2575 ; U6.2@-2221.94,2552.16 -2192.84,2552.16 L13.1@-2153,2592 ; U6.3@-2221.94,2571.84 -2193.16,2571.84 L13.1@-2173,2592
NetLNA1_1: LNA1.1 R1.1 T1.1 | length 118.7
  Top Layer w12: R1.1@-2252.32,1317 -2252.32,1346.88 LNA1.1@-2261.75,1356.32 T1.1@-2186.32,1356.32
  other v1: -2175,1345
NetLNA2_1: LNA2.1 R2.1 T3.1 | length 109.5
  Top Layer w8: LNA2.1@-1810.75,1358.32 -1803.32,1358.32 -1794.32,1349.32 R2.1@-1794.32,1322 -1794.32,1294.32 T3.1@-1770,1270
  other v1: -1769,1269
NetLNA3_1: LNA3.1 R7.1 T6.1 | length 125.3
  Top Layer w8: LNA3.1@-2247.75,2090.31 R7.1@-2219,2061.57
  Top Layer w15: R7.1@-2219,2055.69 -2170.68,2055.69 v1(-2145,2030)
NetLNA4_1: LNA4.1 R8.1 T8.1 | length 133.6
  Top Layer w10: LNA4.1@-1737.75,2089.31 -1725.69,2089.31 -1699,2062.63 R8.1@-1699,2053.69 -1661.32,2053.69 T8.1@-1635,2080
NetR5_2: R5.2 U2.6 | length 54.6
  Top Layer w10: R5.2@-2246,961 -2216.37,990.63 U2.6@-2216.37,1003.29
NetR10_2: R10.2 R13.2 U4.9 | length 92.7
  Top Layer w10: U4.9@-1974.32,1781.68 -1932.32,1781.68 R10.2@-1927,1787 -1905,1787 R13.2@-1890,1772
NetR15_2: R15.2 R17.1 U5.5 | length 102.7
  Top Layer w10: U5.5@-1892.47,2625.06 R17.1@-1892.47,2665.84 ; R17.1@-1892.32,2666 -1876.32,2650 R15.2@-1837,2650
NetR16_2: R16.2 R18.1 U6.5 | length 76.3
  Top Layer w10: U6.5@-2251.47,2621.06 -2251.47,2667.84 R18.1@-2251.32,2668 R16.2@-2222,2668
NetR19_1: R19.1 U8.3 | length 67.7
  Bottom Layer w10: U8.3@-1492.77,1957.34 -1492.77,1959.53 -1445.63,1959.53 R19.1@-1432.63,1972.53
NetR21_1: R21.1 U8.4 | length 50.4
  Bottom Layer w10: U8.4@-1492.77,1928.8 R21.1@-1442.36,1928.8
NetR23_1: R23.1 U8.14 | length 64.9
  Bottom Layer w15: R23.1@-1712.26,1749.53 -1678.3,1783.48 U8.14@-1678.3,1800.35
NetR24_1: R24.1 R28.1 USB1.1 | length 132.8
  Top Layer w15: USB1.1@-1363.82,2544.69 -1363.82,2467.28 R24.1@-1360,2463.46 R28.1@-1310,2463.46
NetR25_2: R25.2 R27.1 U8.20 | length 88.9
  Bottom Layer w15: R27.1@-1809.97,1957.34 U8.20@-1721.12,1957.34
NetR29_2: R29.2 U11.10 | length 57.8
  Bottom Layer w12: U11.10@-1627.8,1081.77 -1627.8,1093.23 R29.2@-1595,1126.03
NetR31_1: R31.1 T19.1 U11.7 | length 147.5
  Bottom Layer w8: T19.1@-1791,1097 -1791,1070.68 R31.1@-1745,1024.68 -1738.11,1017.8 U11.7@-1691.77,1017.8
  other v1: -1797,1109
NetR31_2: R31.2 R32.1 U11.6 | length 106.5
  Bottom Layer w8: R32.1@-1795.32,985 R31.2@-1745,985 -1737.8,992.2 U11.6@-1691.77,992.2
NetR34_1: R34.1 R36.1 U12.3 | length 130.9
  Bottom Layer w8: U12.3@-2102,981.19 -2102,1007.68 R36.1@-2060,1049.68 R34.1@-2015,1049.68
NetR38_1: R38.1 R39.1 U12.4 | length 91
  Bottom Layer w8: U12.4@-2102,878 -2080.32,899.68 R39.1@-2020,899.68
NetR40_1: R40.1 T22.1 | length 95.3
  Top Layer w10: R40.1@-1545.32,1645 T22.1@-1450,1645
NetR41_1: R41.1 T2.1 T7.1 T17.1 T23.1 U1.2 U3.2 U8.2 U13.4 | length 1821.3
  Top Layer w8: U13.4@-1703,1483 -1656,1530 -1619.68,1530 R41.1@-1590,1559.68 -1590,1580 -1550,1620 -1380,1620 T23.1@-1335,1665 ; U3.2@-1477,2126.25 v1(-1477,2148.66)
  Top Layer w12: U13.4@-1703,1482.11 -1679.05,1458.16 -1678.16,1458.16 -1660,1440 v1(-1635,1440) -1635,1435 -1633,1433 U1.2@-1633,1396.25
  Signal Layer 1 w8: v1(-1422,2030) -1477,2085 v1(-1477,2148.66) -1331.66,2148.66 -1230,2047 -1230,1715 -1280,1665 T23.1@-1335,1665
  Bottom Layer w8: U8.2@-1492.77,1985.89 -1464.11,1985.89 T17.1@-1420,2030 ; v1(-1477,2148.66) -1350.66,2275 v1(-1295,2275)
NetT4_1: T4.1 T9.1 U1.5 U3.5 U14.4 | length 2102.1
  Top Layer w8: T4.1@-1633,1273 U1.5@-1633,1327.75
  Top Layer w12: U3.5@-1477,2057.75 -1477,2037 v1(-1465,2025)
  Signal Layer 1 w12: v1(-1620,1259) -1488,1259 -1343,1404 -1343,1489 v1(-1362,1508) -1211,1659 -1211,1876 -1184,1903 -1184,2055 -1307,2178 -1481,2178 -1504,2155 -1504,2064 v1(-1465,2025)
  Bottom Layer w8: v1(-1465,2025) -1465,2130 -1340,2255 -1280,2255 -1240,2295 v1(-1240,2310)
NetT18_1: T18.1 U11.13 | length 87.1
  Bottom Layer w12: U11.13@-1538.23,1043.39 T18.1@-1476.61,1105
  other v1: -1460,1105
NetT21_1: T21.1 U12.1 | length 92.5
  Bottom Layer w8: v1(-2260,1005) -2201.22,1005 U12.1@-2177.4,981.19
V2.4: C30.1 C31.1 C32.1 C33.1 R9.1 R11.2 R12.2 U4.3 | length 765.8
  Top Layer w12: C30.1@-2346,1763 ccw(c-2345,1763) -2345,1762 v1(-2265,1762) U4.3@-2139.68,1762
  Top Layer w20: C30.1@-2346,1763 -2405,1704 -2405,1636 R12.2@-2380,1611 R11.2@-2322,1611
  Signal Layer 1 w12: v1(-2265,1762) -2091,1936 v1(-2023,1936)
VOUT: C85.1 R32.2 R34.2 R39.2 T20.1 | length 360.7
  Bottom Layer w8: R39.2@-2020,860 -1985,860 -1960,885 v1(-1960,985) ; R34.2@-2015,1010 -1990,985 v1(-1960,985) ; R32.2@-1835,985 v1(-1960,985)
VREF2: C18.1 L5.1 R6.1 U2.5 | length 254.6
  Top Layer w8: R6.1@-2290.46,866 -2329.68,905.22 L5.1@-2329.68,918 -2355.68,944 C18.1@-2355.68,961 -2326.68,990 -2312.34,990 U2.5@-2257.71,1044.63
VSYS: C35.1 C36.1 C39.1 C40.1 R28.2 T11.1 T13.1 U5.10 U5.11 U5.12 U5.13 U6.10 U6.11 U6.12 U6.13 | length 2845.6
  Top Layer w10: C36.1@-2044,2455 -2035,2464 -2025,2474 -2007,2492 -1966.47,2492 U5.13@-1951.53,2506.94
  Top Layer w12: U6.12@-2340.06,2532.47 -2362.53,2532.47 -2375,2520 -2375,2477 C40.1@-2385,2467 ; U6.11@-2340.06,2552.16 -2367.84,2552.16 -2385,2535 C40.1@-2385,2467 ; U6.10@-2340.06,2571.84 -2383.16,2571.84 -2399,2556 C40.1@-2399,2453 ; U6.13@-2310.53,2502.94 -2323.47,2490 -2345,2490 -2382,2453 C40.1@-2399,2453 ; C36.1@-2045,2456 -2045,2535 -2004.16,2575.84 U5.10@-1981.06,2575.84 ; C36.1@-2044,2455 -2077.52,2421.48 C35.1@-2077.52,2365 -2077.52,2312.48 -2100,2290 ; C36.1@-2035,2464 -2035,2520 -1998.84,2556.16 U5.11@-1981.06,2556.16 ; C36.1@-2025,2474 -2025,2515 -2003.53,2536.47 U5.12@-1981.06,2536.47 ; R28.2@-1310,2396 -1310,2345 -1425,2230 -2040,2230 -2100,2290 ; R28.2@-1306,2400 T11.1@-1165,2400 ; C40.1@-2399,2453 C40.1@-2385,2467 ; C40.1@-2399,2453 -2428.52,2453 C39.1@-2513.52,2368 -2435.52,2290 -2100,2290
pads on no net: J2.3 J3.1 U1.0 U3.0 U5.4 U6.4 U7.4 U13.1 U14.1 USB1.2 USB1.3 USB1.4

## Polygon pours and split planes (outlines as drawn)
GND on Bottom Layer "Bottom Layer-No Net" (solid, remove dead copper, pour order 7): -2605,2709 -1077,2709 -1077,840 -2605,840
GND on Signal Layer 1 "Bottom Layer-No Net" (solid, remove dead copper, pour order 8): -2605,2709 -1077,2709 -1077,840 -2605,840
GND on Top Layer "Bottom Layer-No Net" (solid, remove dead copper, pour order 6): -2607,2709 -1079,2709 -1079,840 -2607,840
GND on Top Layer "Bottom Layer-No Net" (solid, remove dead copper, pour order 9): -2414,1178 -2413,1179 -2124,1179 -2098,1179 -2057,1138 -2057,1024 -2057,952 -2116,893 -2123,886 -2456,886 -2456,1158 -2457,1159
GND on Internal Plane 1 (split plane): -1097.1,2657.68 -1097.1,897.32 -1134.33,860.1 -2547.67,860.1 -2584.9,897.32 -2584.9,2660.68 -2556.68,2688.9 -1128.32,2688.9

## Keep-outs
Keep-Out Layer:
  the board outline again, w6

## Silkscreen, mask and mechanical layers (free items; w line width, h text height)
Top Solder:
  rectangle: -1685,1837 -1527,1993
Bottom Solder:
  rectangle: -2146,1664 -1897,1847
  rectangle: -2243,1038 -2119,1121
  rectangle: -2219,1048 -2088,1147
  rectangle: -2372,2502 -2204,2637
  rectangle: -2033,2511 -1841,2643
Mechanical 6:
  lines w10: -5448.82,-1791.3 -5448.82,-1268.25 ; -5133.86,-1941.3 -5133.86,-1791.3 ; -5094.49,-413.35 -4374.66,-413.35 ; -4937.01,-2185 -4787.01,-2185 ; -4937.01,-1988.15 -4737.31,-1988.15 ; -4188.98,-1988.15 -3989.28,-1988.15
Mechanical 8:
  lines w10: -5448.82,-1133.25 -5448.82,-610.2 ; -5244.49,-2185 -5094.49,-2185 ; -5133.86,-1673.19 -5133.86,-1523.19 ; -4388.67,-1988.15 -4188.98,-1988.15 ; -4003.29,-413.35 -3283.46,-413.35 ; -3640.64,-1988.15 -3440.94,-1988.15